# Altium PCB rocket_project_pcb.PcbDoc
Units mil, origin at the board's own origin, x right, y up, seen from the top; angles counter-clockwise.
Board outline 6000 x 4000 mil, 2 copper layers (Top Layer, Bottom Layer); 12 components, 13 nets, 54 pads, 1 vias.
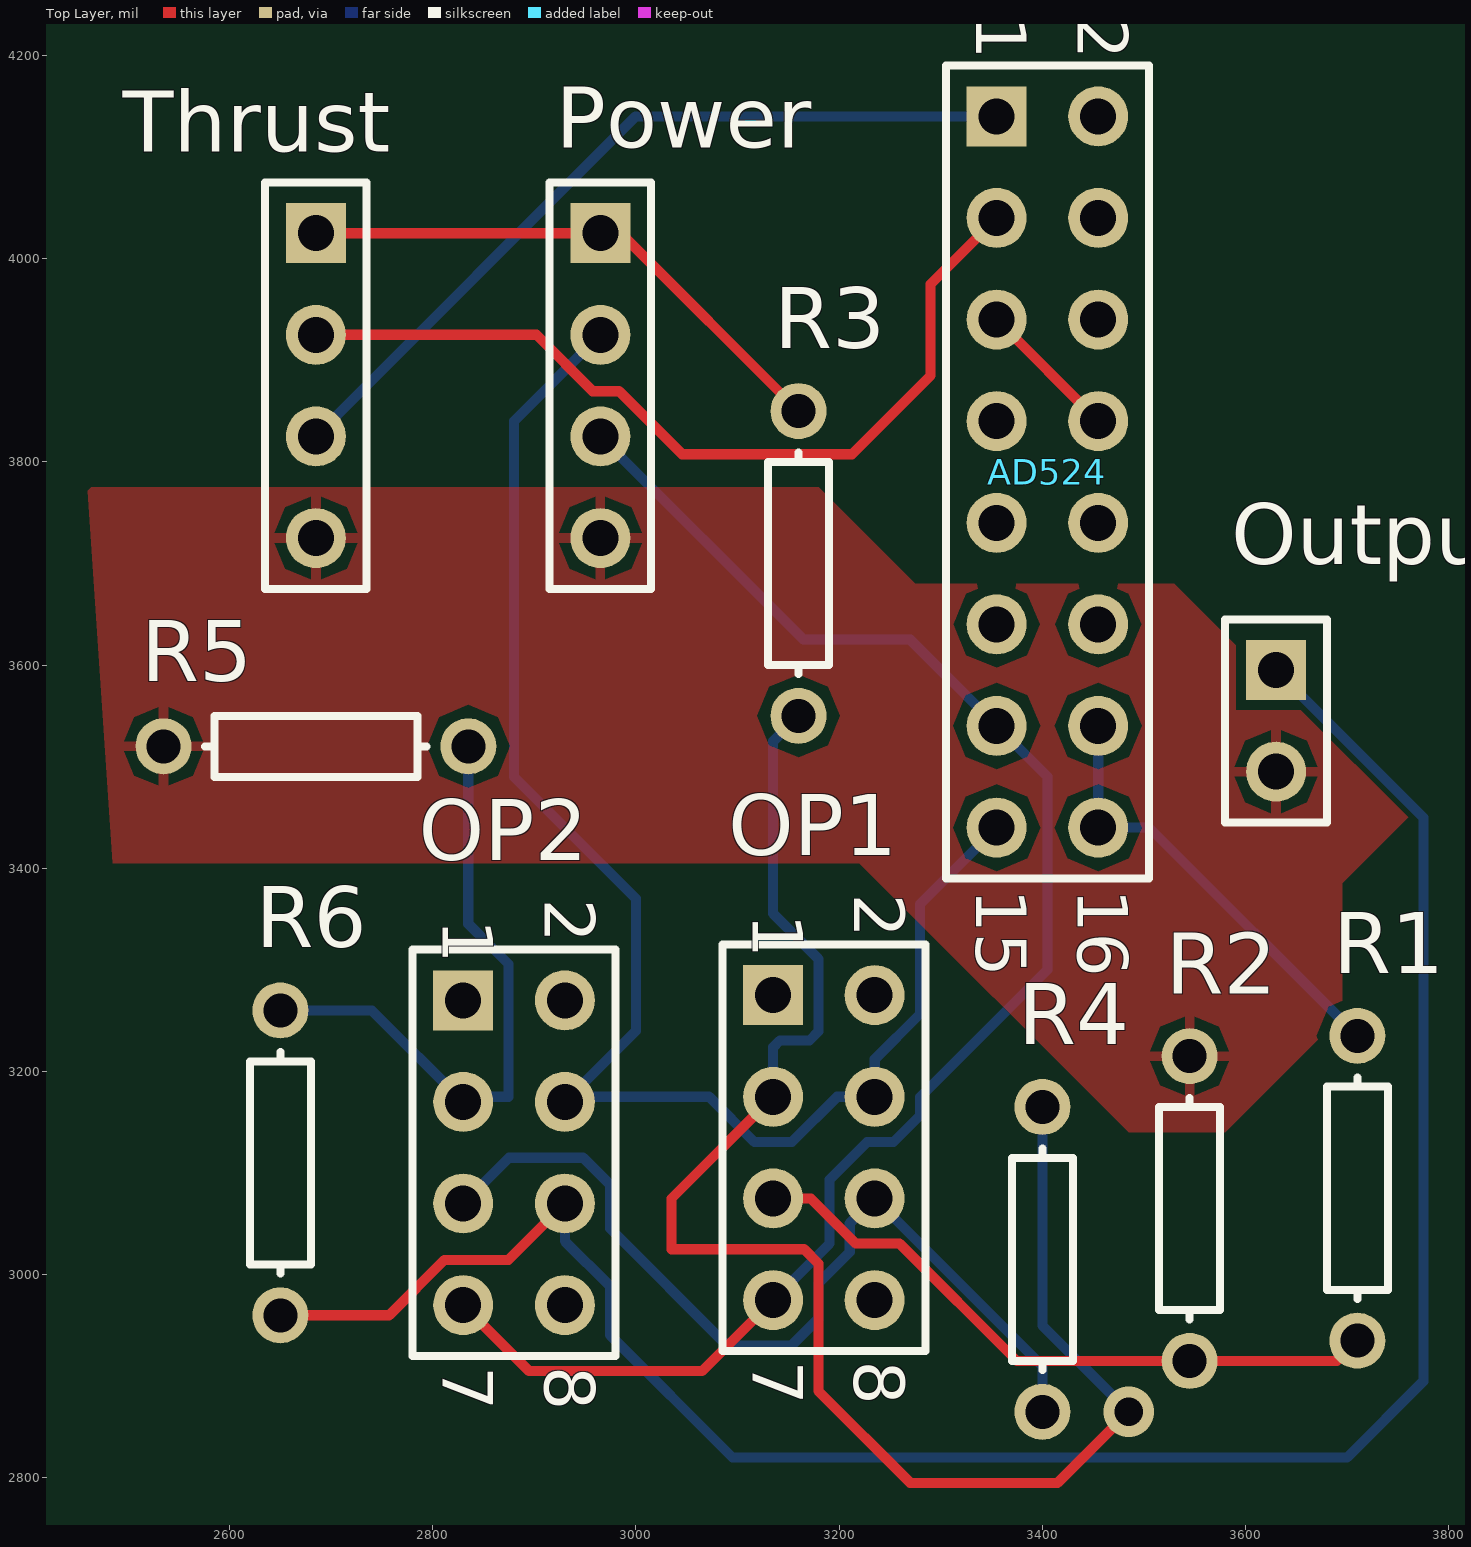
[diagram p0: Top Layer view]
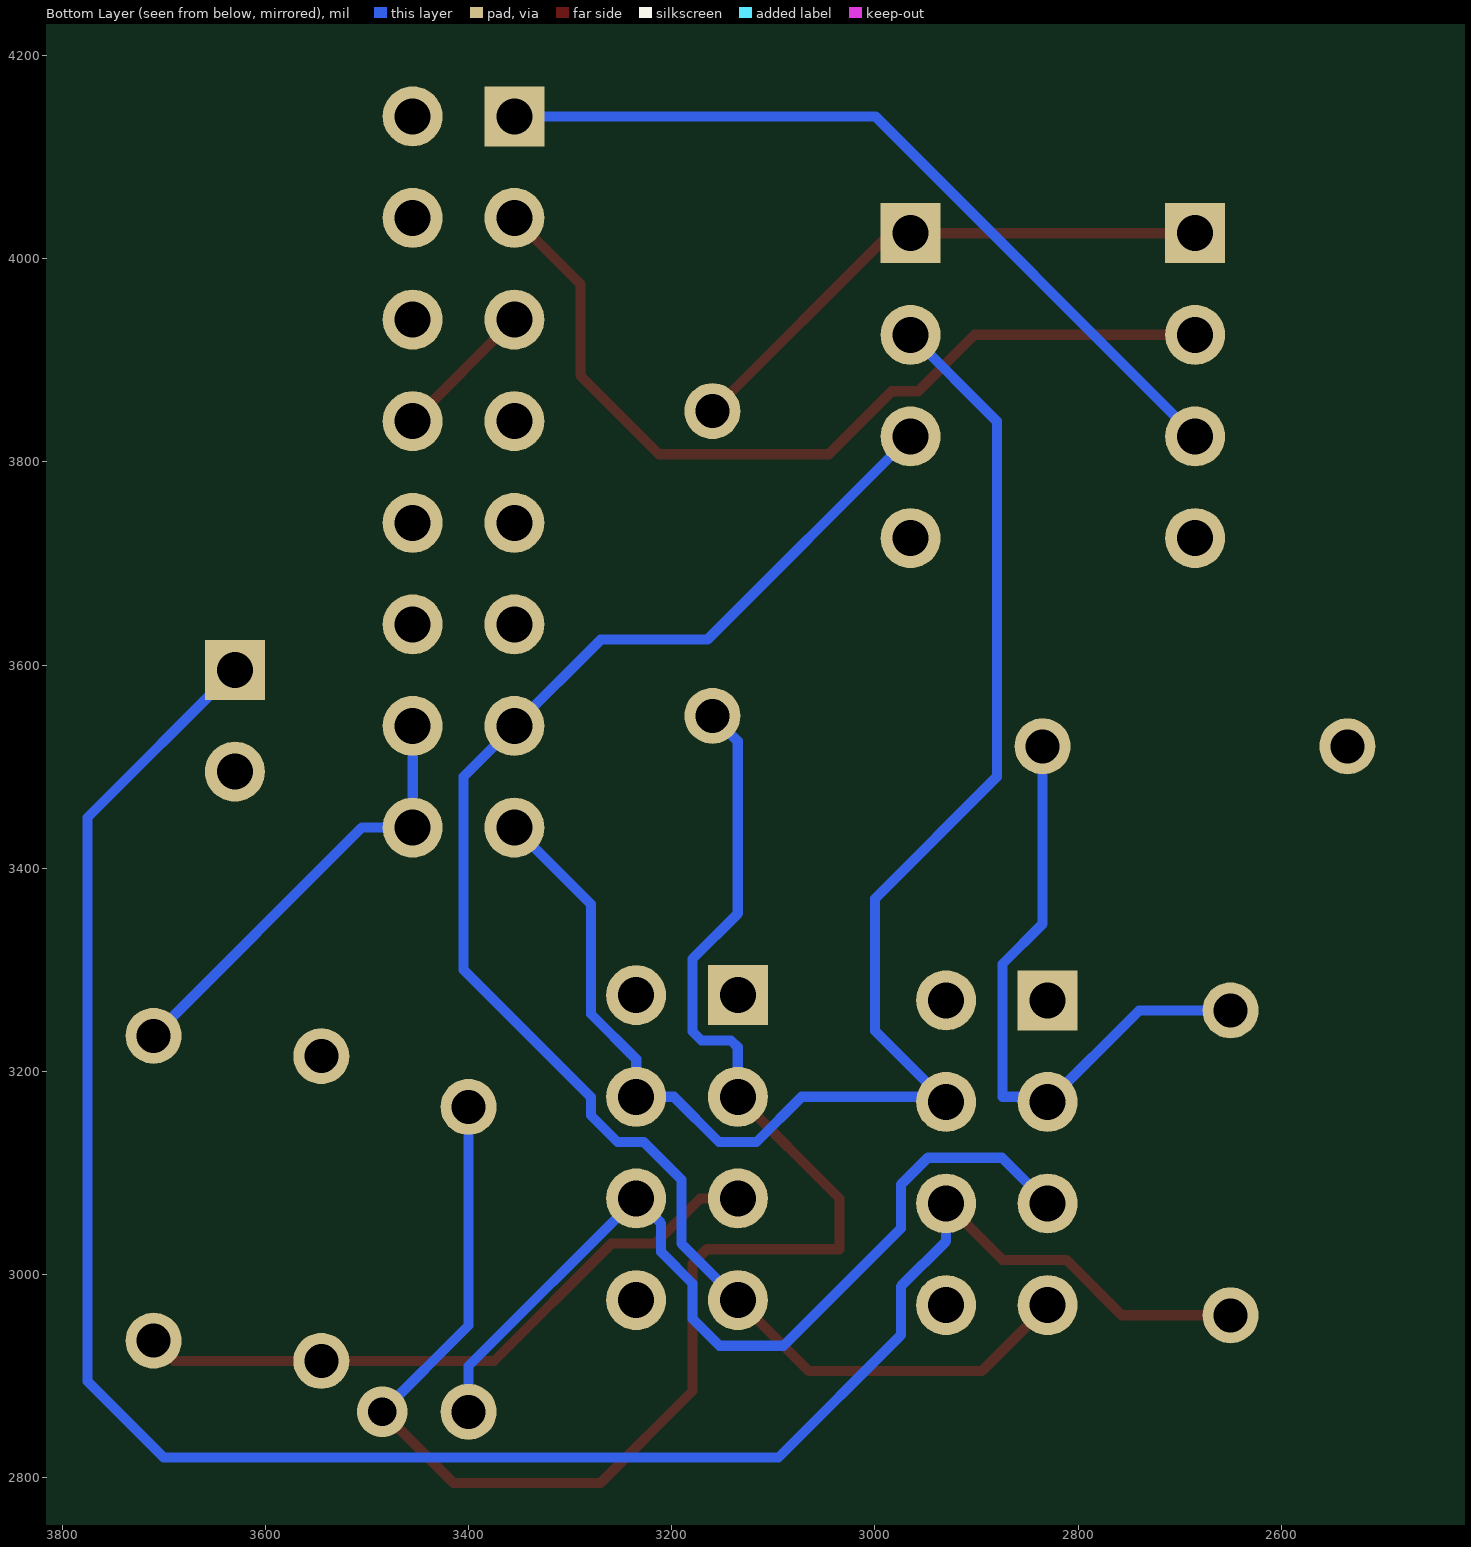
[diagram p1: Bottom Layer view, seen from below]

## Layer stack, top to bottom
Top Solder: solder mask 0.4, Solder Resist, Dk 3.5
Top Layer: signal copper 1.4
Dielectric 1: dielectric 12.6, FR-4, Dk 4.8
Bottom Layer: signal copper 1.4
Bottom Solder: solder mask 0.4, Solder Resist, Dk 3.5

## Board outline
1000,1000 7000,1000 7000,5000 1000,5000

## Design rules (kind name [scope] priority, off if disabled: settings)
Clearance Clearance_1 [InNamedPolygon('Top Layer-No Net')] p1: gap=10 ignorepadtopadclearanceinfootprint=FALSE except(0: Arc-Hole Track-Hole SMDPad-Hole THPad-Hole Via-Hole Fill-Hole Poly-Hole Region-Hole Text-Hole)
Clearance [All] p2: gap=10 ignorepadtopadclearanceinfootprint=FALSE except(0: Arc-Hole Track-Hole SMDPad-Hole THPad-Hole Via-Hole Fill-Hole Poly-Hole Region-Hole Text-Hole)
PolygonConnect [All] p1: connectstyle=Relief reliefconductorwidth=10 reliefentries=4 polygonreliefangle="90 Angle" airgapwidth=10
RoutingVias [All] p1: holewidth=28 width=50 viastyle="Through Hole" minholewidth=28 minwidth=50 maxholewidth=28 maxwidth=50
SolderMaskExpansion [All] p1: expansion=4
Width [All] p1: maxlimit=10 minlimit=10 preferedwidth=10
30 further rules are at their usual default settings.

## Components (designator, comment, footprint, x,y, rotation, side; value= is the part's Value field where it differs from the comment)
AD524 "AD524" HDR2X8 3355,4140 r270 top
OP1 "LM741" HDR2X4 3135,3275 r270 top
OP2 "LM741" HDR2X4 2830,3270 r270 top
Output "Out" HDR1X2 3630,3595 r270 top
Power "Power" HDR1X4 2965,4025 r270 top
R1 "Res1" AXIAL-0.3 3710,3085 r90 top value=30K
R2 "Res2" AXIAL-0.3 3545,3065 r90 top value=30K
R3 "Res3" AXIAL-0.3 3160,3700 r270 top value=30K
R4 "Res4" AXIAL-0.3 3400,3015 r90 top value=30K
R5 "Res5" AXIAL-0.3 2685,3520 r0 top value=20K
R6 "Res6" AXIAL-0.3 2650,3110 r270 top value=100K
Thrust "In" HDR1X4 2685,4025 r270 top

## Footprints (in the part's own frame and the unit in brackets; to place one, negate y for a bottom-side part, rotate by r counter-clockwise, add the part's x,y. Pads: shape width x height; smd on the part's side, far side on the other; paste and mask are expansions set on the pad)
AXIAL-0.3 [mm] "Axial Device, Thru-Hole; 2 Leads; 0.3 in Pin Spacing"
  round 1.4 hole 0.85: 1(-3.81,0) 2(3.81,0)
  silkscreen extent -2.77,-0.76 2.77,0.76
HDR1X2 [mm] "Connector; Header; 2 Position"
  rect 1.5x1.5 hole 0.9: 1(0,0)
  round 1.5 hole 0.9: 2(2.54,0)
  silkscreen extent -1.27,-1.27 3.81,1.27
HDR1X4 [mm] "Connector; Header; 4 Position"
  rect 1.5x1.5 hole 0.9: 1(0,0)
  round 1.5 hole 0.9: 2(2.54,0) 3(5.08,0) 4(7.62,0)
  silkscreen extent -1.27,-1.27 8.89,1.27
HDR2X4 [mm] "Connector; Header; 4x2 Position"
  rect 1.5x1.5 hole 0.9: 1(0,0)
  round 1.5 hole 0.9: 2(0,2.54) 3(2.54,0) 4(2.54,2.54) 5(5.08,0) 6(5.08,2.54) 7(7.62,0) 8(7.62,2.54)
  silkscreen extent -1.27,-1.27 8.89,3.81
HDR2X8 [mm] "Connector; Header; 8x2 Position"
  rect 1.5x1.5 hole 0.9: 1(0,0)
  round 1.5 hole 0.9: 2(0,2.54) 3(2.54,0) 4(2.54,2.54) 5(5.08,0) 6(5.08,2.54) 7(7.62,0) 8(7.62,2.54) 9(10.16,0) 10(10.16,2.54) 11(12.7,0) 12(12.7,2.54) 13(15.24,0) 14(15.24,2.54) 15(17.78,0) 16(17.78,2.54)
  silkscreen extent -1.27,-1.27 19.05,3.81

## Part data
AD524: library part "Header 8X2", "Header, 8-Pin, Dual row", LatestRevisionDate=17-Jul-2002, LatestRevisionNote="Re-released for DXP Platform.", Publisher="Altium Limited"
OP1 OP2: library part "Header 4X2", "Header, 4-Pin, Dual row", LatestRevisionDate=17-Jul-2002, LatestRevisionNote="Re-released for DXP Platform.", Publisher="Altium Limited"
Output: library part "Header 2", "Header, 2-Pin", LatestRevisionDate=17-Jul-2002, LatestRevisionNote="Re-released for DXP Platform.", Publisher="Altium Limited"
Power Thrust: library part "Header 4", "Header, 4-Pin", LatestRevisionDate=17-Jul-2002, LatestRevisionNote="Re-released for DXP Platform.", Publisher="Altium Limited"
R1: "Resistor", LatestRevisionDate=17-Jul-2002, LatestRevisionNote="Re-released for DXP Platform.", PackageDescription="Axial Device, Thru-Hole; 2 Leads; 0.3 in Pin Spacing", PackageReference=AXIAL-0.3, Published=8-Jun-2000, Publisher="Altium Limited"
R2 R3 R4 R5 R6: library part Res1, "Resistor", LatestRevisionDate=17-Jul-2002, LatestRevisionNote="Re-released for DXP Platform.", PackageDescription="Axial Device, Thru-Hole; 2 Leads; 0.3 in Pin Spacing", PackageReference=AXIAL-0.3, Published=8-Jun-2000, Publisher="Altium Limited"

## Via types
v1: diameter 50, hole 28, Top Layer to Bottom Layer, 1 vias

## Nets (pads, with @x,y where several pads share a name; then routed paths per layer and width w, separated by ;. In a path a pad name is that pad's centre, name@x,y a point inside that pad or via, vN(x,y) a via of type N, cw(c..) or ccw(c..) an arc to the next point about the centre after c; other vN are vias at no path point)
+5V: Power.1 R3.1 Thrust.1 | length 547.5
  Top Layer w10: Thrust.1 Power.1 2985,4025 R3.1
+15V: AD524.15 OP1.4 OP2.4 Power.2 | length 1520.5
  Bottom Layer w10: OP2.4 OP2.4@2935,3175 ; Power.2 2880,3840 2880,3490 3000,3370 3000,3240 OP2.4@2935,3175 ; AD524.15 3279.53,3364.53 3279.53,3256.56 3235,3212.03 OP1.4 3197.97,3175 3153.44,3130.47 3116.56,3130.47 3072.03,3175 OP2.4@2935,3175
-15V: AD524.13 OP1.7 OP2.7 Power.3 | length 1581.7
  Top Layer w10: OP2.7 2895,2905 3065,2905 OP1.7
  Bottom Layer w10: Power.3 3165,3625 3270,3625 AD524.13 3405,3490 3405,3300 3279.53,3174.53 3279.53,3156.56 3253.44,3130.47 3227.5,3130.47 3190.47,3093.44 3190.47,3030.47 OP1.7
GND: Output.2 Power.4 R2.2 R5.1 Thrust.4
NetAD524_1: AD524.1 Thrust.3 | length 800.6
  Bottom Layer w10: Thrust.3 2685,3825.27 2999.73,4140 AD524.1
NetAD524_3: AD524.3 Thrust.2 | length 867.8
  Top Layer w10: Thrust.2 2902.03,3925 2957.5,3869.53 2983.44,3869.53 3045.53,3807.44 3212.56,3807.44 3290,3884.88 3290,3975 AD524.3
NetAD524_5: AD524.5 AD524.8 | length 141.4
  Top Layer w10: AD524.5 AD524.8
NetAD524_14: AD524.14 AD524.16 R1.2 | length 439.9
  Bottom Layer w10: AD524.14 AD524.16 3505,3440 R1.2
NetOP1_3: OP1.3 R3.2 R4.2 | length 1613.7
  Top Layer w10: OP1.3 3035,3075 3035,3025 3165.47,3025 3179.53,3010.94 3179.53,2885.47 3270,2795 3415,2795 v1(3485,2865)
  Bottom Layer w10: OP1.3 3135,3223.83 3141.64,3230.47 3170.74,3230.47 3179.53,3239.26 3179.53,3310.74 3135,3355.27 3135,3525 R3.2 ; R4.2 3400,2950 v1(3485,2865)
NetOP1_5: OP1.5 R1.1 R2.1 | length 649.6
  Top Layer w10: OP1.5 3172.03,3075 3216.56,3030.47 3259.53,3030.47 3375,2915 R2.1 3690,2915 R1.1
NetOP1_6: OP1.6 OP2.5 R4.1 | length 900.7
  Bottom Layer w10: OP2.5 2875,3115 2947.97,3115 2974.53,3088.44 2974.53,3045.47 3090,2930 3152.97,2930 3179.53,2956.56 3179.53,2991.24 3210.47,3022.19 3210.47,3050.47 OP1.6 3400,2910 R4.1
NetOP2_3: OP2.3 R5.2 R6.1 | length 625.3
  Bottom Layer w10: R6.1 2740,3260 OP2.3 2835,3175 2874.53,3175 2874.53,3305.74 2835,3345.27 R5.2
NetOP2_6: OP2.6 Output.1 R6.2 | length 2115
  Top Layer w10: R6.2 2757.03,2960 2811.56,3014.53 2874.53,3014.53 OP2.6
  Bottom Layer w10: OP2.6 2930,3032.97 2974.53,2988.44 2974.53,2940.47 3095,2820 3700,2820 3775,2895 3775,3450 Output.1
pads on no net: AD524.2 AD524.4 AD524.6 AD524.7 AD524.9 AD524.10 AD524.11 AD524.12 OP1.1 OP1.2 OP1.8 OP2.1 OP2.2 OP2.8

## Polygon pours and split planes (outlines as drawn)
GND on Top Layer "Top Layer-No Net" (solid, pour order 2): 2460,3775 3180,3775 3275,3680 3530,3680 3760,3450 3695,3385 3695,3250 3690,3250 3580,3140 3485,3140 3220,3405 2485,3405

## Other copper
Top Layer:
  region: 2920,3405
  region: 2965,3545

## Text inside footprints (layer, text, board x,y; h text height)
AD524: Top Overlay "2" at 3435,4240 h50 r270; Top Overlay "1" at 3335,4240 h50 r270; Top Overlay "15" at 3335,3380 h50 r270; Top Overlay "16" at 3435,3380 h50 r270
OP1: Top Overlay "2" at 3215,3375 h50 r270; Top Overlay "1" at 3115,3355 h50 r270; Top Overlay "7" at 3115,2915 h50 r270; Top Overlay "8" at 3215,2915 h50 r270
OP2: Top Overlay "2" at 2910,3370 h50 r270; Top Overlay "1" at 2810,3350 h50 r270; Top Overlay "7" at 2810,2910 h50 r270; Top Overlay "8" at 2910,2910 h50 r270